# Altium PCB Umgebungssensor_PCB.PcbDoc
Units mm, origin at the board's own origin, x right, y up, seen from the top; angles counter-clockwise.
Board outline 45.1 x 29 mm, 2 copper layers (Top Layer, Bottom Layer); 3 components, 4 nets, 27 pads, 0 vias.
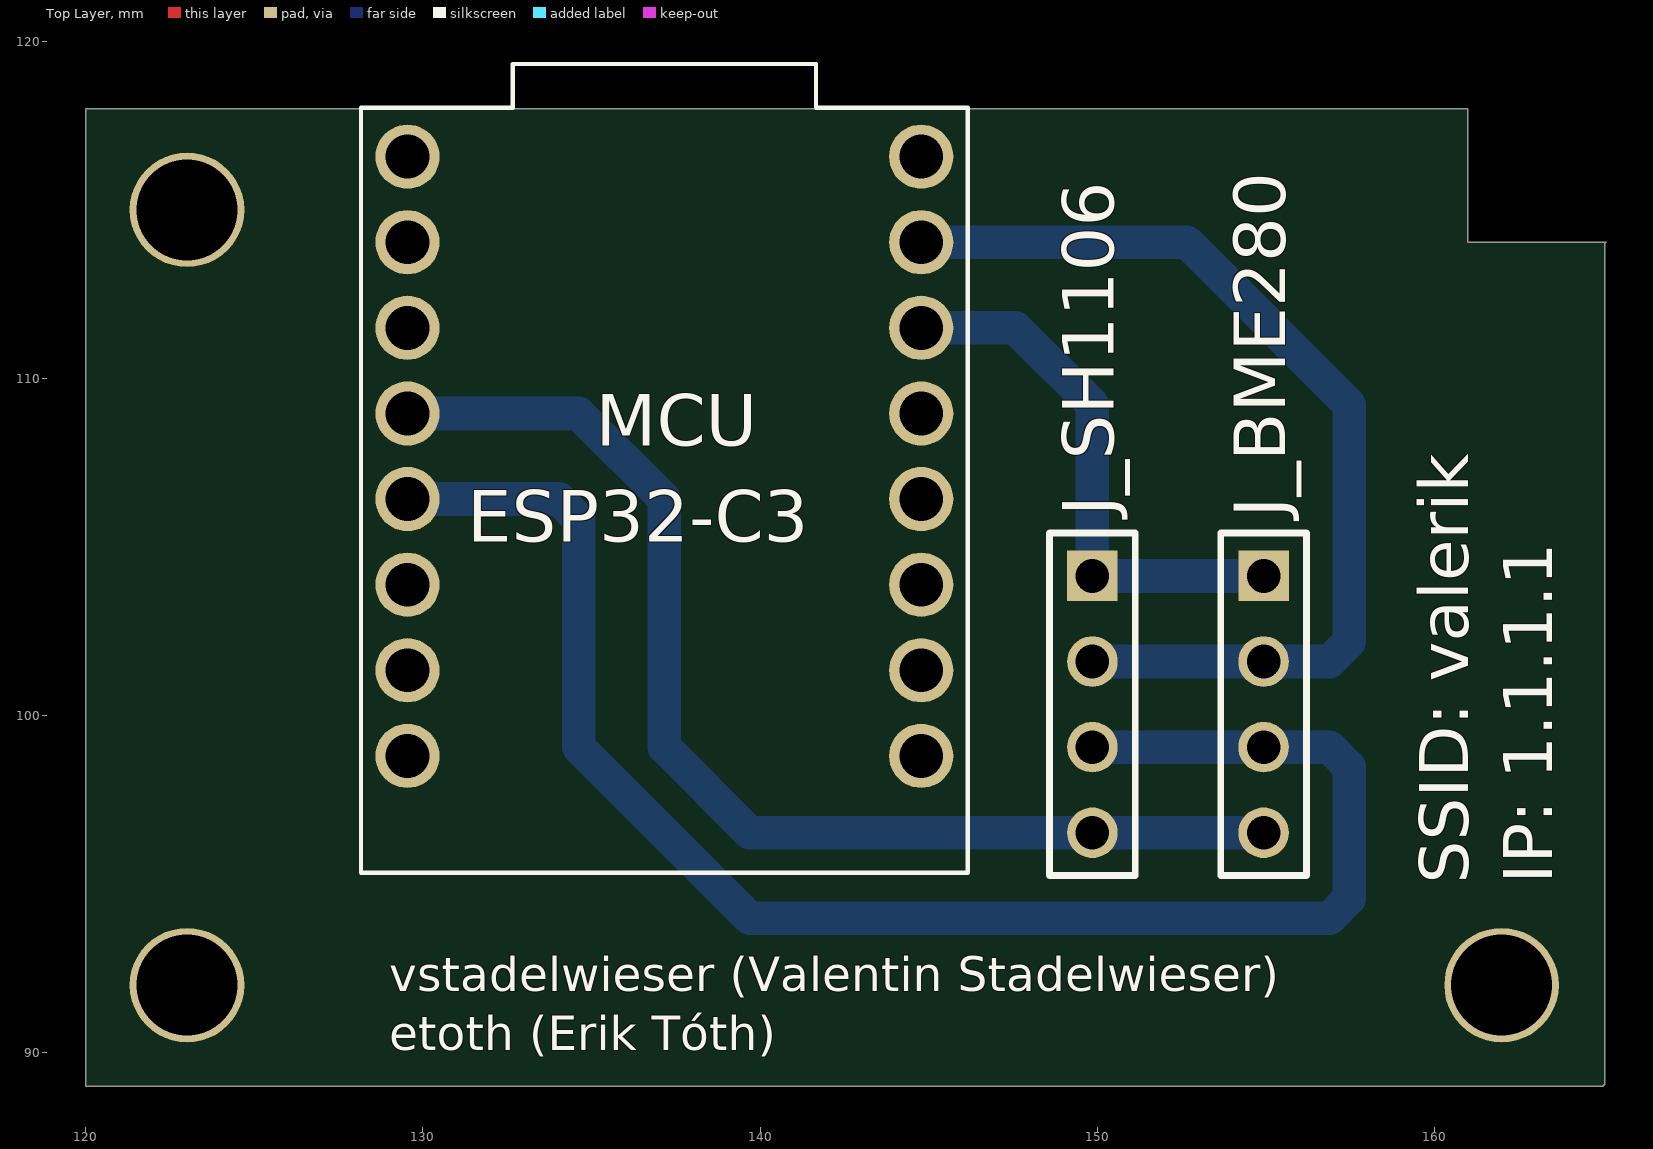
[diagram p0: Top Layer view]
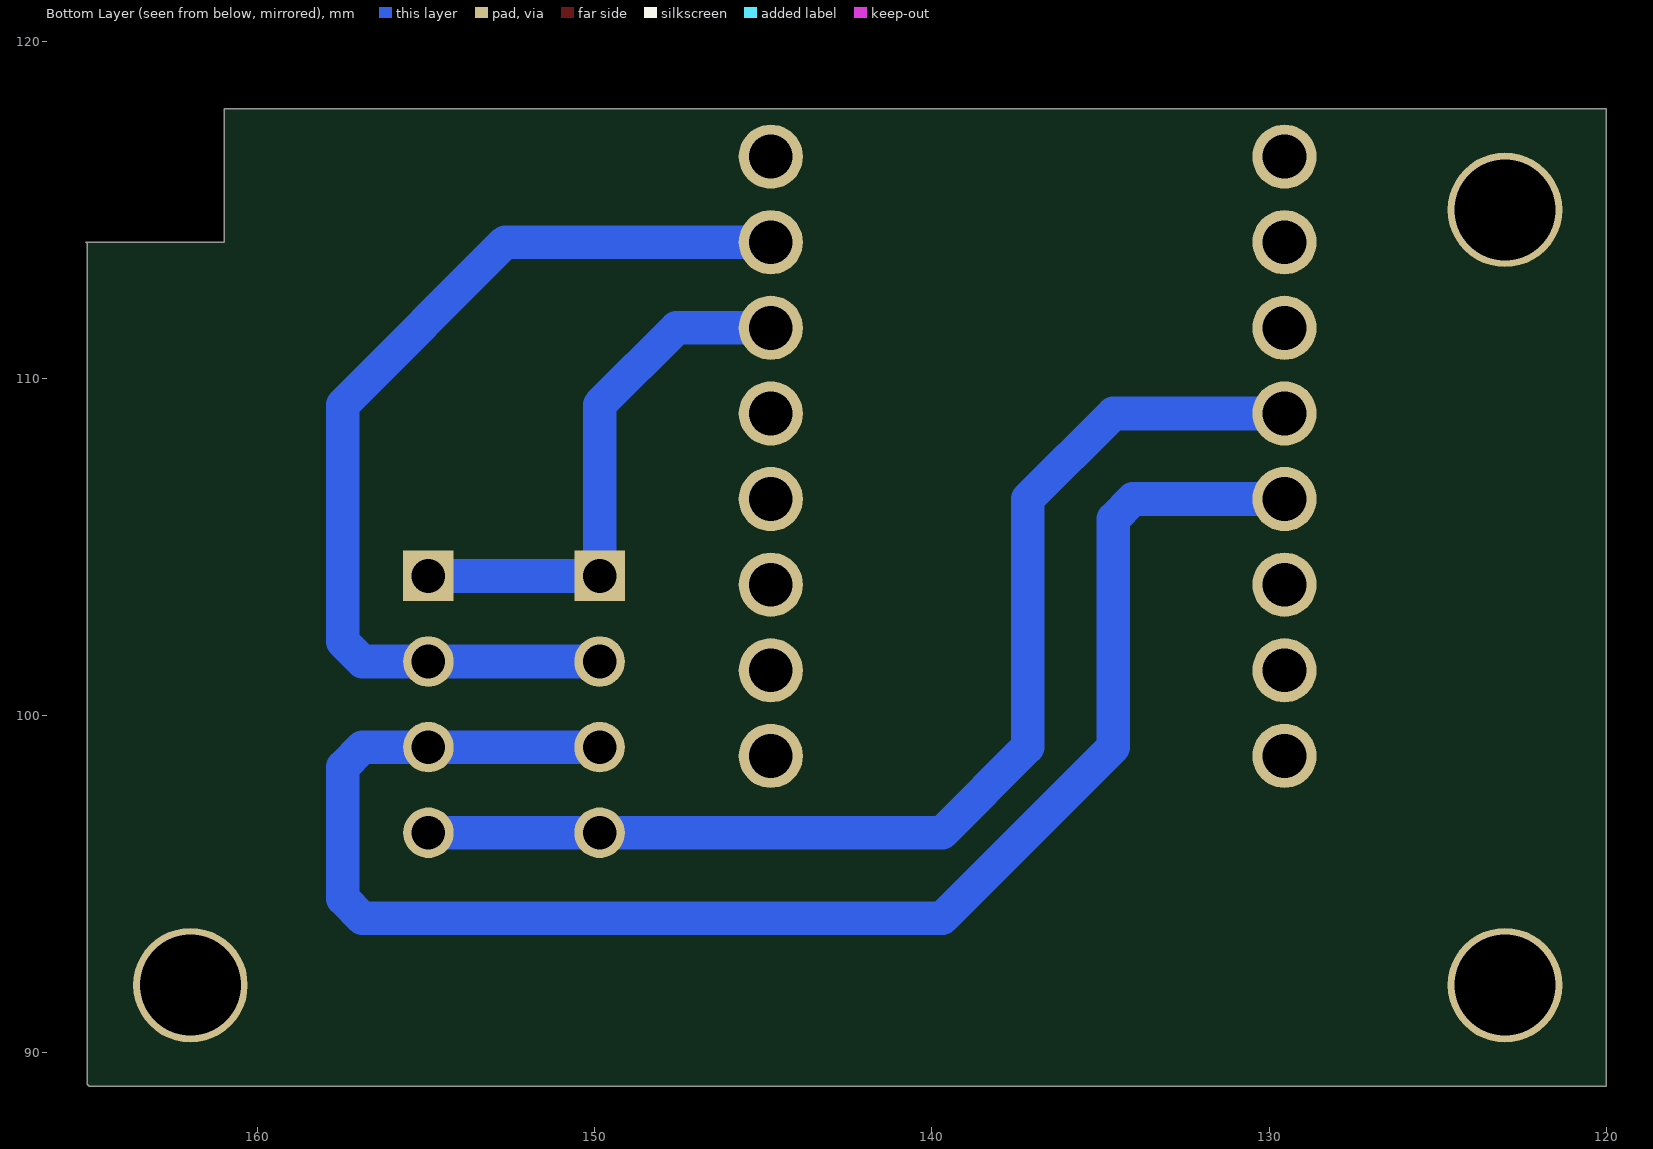
[diagram p1: Bottom Layer view, seen from below]

## Layer stack, top to bottom
Top Solder: solder mask 0.0102, Solder Resist, Dk 3.5
Top Layer: signal copper 0.0356
Dielectric1: dielectric 0.32, FR-4, Dk 4.8
Bottom Layer: signal copper 0.0356
Bottom Solder: solder mask 0.0102, Solder Resist, Dk 3.5

## Board outline
120,89 120,118 161,118 161,114.04 165.1,114.04 165.06,114 165.06,89.06 165,89

## Design rules (kind name [scope] priority, off if disabled: settings)
Clearance "Text (Polygon)" [inPolygon vs isText] p1: gap=0 ignorepadtopadclearanceinfootprint=FALSE
Clearance "Masseflaeche (Polygon)" [All vs inPolygon] p2: gap=0.508 ignorepadtopadclearanceinfootprint=FALSE except(0: Arc-Hole Track-Hole SMDPad-Hole THPad-Hole Via-Hole Fill-Hole Poly-Hole Region-Hole Text-Hole)
Clearance "Abstand (Clearance)" [All] p3: gap=0.254 ignorepadtopadclearanceinfootprint=FALSE except(0: Arc-Hole Track-Hole SMDPad-Hole THPad-Hole Via-Hole Fill-Hole Poly-Hole Region-Hole Text-Hole)
DiffPairsRouting [All] p1: maxlimit=0.381 minlimit=0.305 mostfreqgap=0.305 toplayer_minwidth=0.381 toplayer_maxwidth=0.381 toplayer_prefwidth=0.381 bottomlayer_minwidth=0.381 bottomlayer_maxwidth=0.381 bottomlayer_prefwidth=0.381 maxuncoupledlength=12.7
FabricationTestPointUsage TestPointUsage [All] p1: valid=0 allowmultiple=FALSE
FabricationTestpoint Testpoint [All] p1: side=3 testpointundercomponent=TRUE minsize=1.016 maxsize=2.54 preferedsize=1.524 minholesize=0 maxholesize=1.016 preferedholesize=0.813 testpointgrid=0.025 allowsidetop=TRUE allowsidebottom=TRUE usegrid=TRUE gridtolerance=0
HoleSize [All] p1: absolutevalues=TRUE maxlimit=2.54 minlimit=0.711 maxpercent=80.000 minpercent=20.000
HoleToHoleClearance [All] p1: gap=0.254 allowstackedmicrovias=FALSE
PlaneConnect [All] p1: planeconnectstyle=Relief reliefexpansion=0.508 reliefentries=4 reliefconductorwidth=0.813 reliefairgap=0.254
PolygonConnect [All] p1: connectstyle=Relief reliefconductorwidth=0.813 reliefentries=4 polygonreliefangle="90 Angle" airgapwidth=0.254
RoomDefinition Umgebungssensor_PCB [InComponentClass('Umgebungssensor_PCB')] p1: confinementstyle=ConfineIn formatcopy=TRUE lockcomponents=FALSE outline 63.5,53.34 218.44,53.34 218.44,157.48 63.5,157.48
RoutingVias [All] p1: holewidth=0.711 width=1.27 viastyle="Through Hole" minholewidth=0.711 minwidth=1.27 maxholewidth=0.711 maxwidth=1.27
SMDEntry [All] p1: side=TRUE corner=TRUE anyangle=FALSE
SilkToSilkClearance [All] p1 off: silktosilkclearance=0.254
SilkToSolderMaskClearance SilkscreenOverComponentPads [IsPad] p1 off: minsilkscreentomaskgap=0.254 clearancetoexposedcopper=TRUE
SolderMaskExpansion [All] p1: expansion=0.102 istentingtop=FALSE
UnRoutedNet [All] p1: checkbadconnections=TRUE
Width [All] p1: maxlimit=5.08 minlimit=0.279 preferedwidth=0.635 minimp=50.000000 maximp=50.000000 favimp=50.000000
21 further rules are at their usual default settings.

## Components (designator, comment, footprint, x,y, rotation, side; value= is the part's Value field where it differs from the comment)
J_BME280 "Header 4" HDR1X4 154.94,104.14 r270 top
J_SH1106 "Header 4" HDR1X4 149.86,104.14 r270 top
MCU "ESP32-C3" MODULE_ESP32-C3_SUPERMINI 137.16,106.68 r0 top

## Footprints (in the part's own frame and the unit in brackets; to place one, negate y for a bottom-side part, rotate by r counter-clockwise, add the part's x,y. Pads: shape width x height; smd on the part's side, far side on the other; paste and mask are expansions set on the pad)
HDR1X4 [mm] "Connector; Header; 4 Position"
  rect 1.5x1.5 hole 1: 1(0,0)
  round 1.5 hole 1: 2(2.54,0) 3(5.08,0) 4(7.62,0)
  silkscreen extent -1.27,-1.27 8.89,1.27
MODULE_ESP32-C3_SUPERMINI [mm]
  round 1.905 hole 1.3: 0(7.62,-7.88) 1(7.62,-5.34) 2(7.62,-2.8) 3(7.62,-0.26) 3.3(7.62,4.82) 4(7.62,2.28) 5(-7.62,9.9) 5V(7.62,9.9) 6(-7.62,7.36) 7(-7.62,4.82) 8(-7.62,2.28) 9(-7.62,-0.26) 10(-7.62,-2.8) 20(-7.62,-5.34) 21(-7.62,-7.88) G(7.62,7.36)
  silkscreen extent -9,-11.35 9,12.65, body extent -9,-11.35 9,12.65, height 4.16

## Part data
J_BME280 J_SH1106: "Header, 4-Pin", LatestRevisionDate=17-Jul-2002, LatestRevisionNote="Re-released for DXP Platform.", Publisher="Altium Limited"
MCU: library part ESP32-C3_SUPERMINI_TH, "Super tiny ESP32-C3 board", Package=Package, Check_prices=https://www.snapeda.com/parts/ESP32-C3%20SuperMini_TH/Espressif+Systems/view-part/?ref=eda, MF="Espressif Systems", MP="ESP32-C3 SuperMini_TH", SnapEDA_Link=https://www.snapeda.com/parts/ESP32-C3%20SuperMini_TH/Espressif+Systems/view-part/?ref=snap

## Free pads (board coordinates)
  round 3.4 hole 3: 55(123,115) 56(123,92) 57(162,92)

## Nets (pads, with @x,y where several pads share a name; then routed paths per layer and width w, separated by ;. In a path a pad name is that pad's centre, name@x,y a point inside that pad or via, vN(x,y) a via of type N, cw(c..) or ccw(c..) an arc to the next point about the centre after c; other vN are vias at no path point)
3V3: J_BME280.1 J_SH1106.1 MCU.3.3 | length 16.2
  Bottom Layer w1: MCU.3.3 147.58,111.5 149.86,109.22 J_SH1106.1 J_BME280.1
GND: J_BME280.2 J_SH1106.2 MCU.G | length 29.6
  Bottom Layer w1: MCU.G 152.66,114.04 157.48,109.22 157.48,102.186 156.894,101.6 J_BME280.2 J_SH1106.2
SCK: J_BME280.3 J_SH1106.3 MCU.9 | length 49.1
  Bottom Layer w1: MCU.9 134.034,106.42 134.62,105.834 134.62,99.06 139.7,93.98 156.894,93.98 157.48,94.566 157.48,98.474 156.894,99.06 J_BME280.3 J_SH1106.3
SDA: J_BME280.4 J_SH1106.4 MCU.8 | length 34.9
  Bottom Layer w1: MCU.8 134.62,108.96 137.16,106.42 137.16,99.06 139.7,96.52 J_SH1106.4 J_BME280.4
pads on no net: MCU.0 MCU.1 MCU.2 MCU.3 MCU.4 MCU.5 MCU.5V MCU.6 MCU.7 MCU.10 MCU.20 MCU.21

## Other copper
Top Layer:
  text "LAYOUT TOP" at 261.62,22.352 h1.78
  text "2" at 261.62,7.112 h1.78
Bottom Layer:
  text "LAYOUT BOTTOM" at 261.62,22.352 h1.78
  text "3" at 261.62,7.112 h1.78

## Silkscreen, mask and mechanical layers (free items; w line width, h text height)
Top Overlay:
  text "SSID: valerik / IP: 1.1.1.1" at 164,95 h2.5 r90
  text "vstadelwieser (Valentin Stadelwieser) / etoth (Erik Tóth)" at 129,89.72 h1.75
  text "BESTUECK. TOP" at 261.62,22.352 h1.78
  text "4" at 261.62,7.112 h1.78
Bottom Overlay:
  text "BESTUECK. BOTTOM" at 261.62,22.352 h1.78
  text "5" at 261.62,7.112 h1.78
Mechanical 4 (Printumriss):
  lines w0.203: 120,89 165,89 165.06,89.06 165.06,114 165.02,114.04 161,114.04 161,118 120,118 120,89
Mechanical 16 (Blatt-Beschriftung):
  drawing of 350 lines, arcs and shapes, not listed
  text "1" at 36.246,189.611 h1.78
  text "2" at 108.89,189.611 h1.78
  text "3" at 182.042,189.611 h1.78
  text "4" at 254.94,189.611 h1.78
  text "A" at 1.905,166.599 h1.78
  text "A" at 288.925,166.599 h1.78
  text "B" at 1.905,118.542 h1.78
  text "B" at 288.925,118.542 h1.78
  text "C" at 1.905,70.028 h1.78
  text "C" at 288.925,70.028 h1.78
  text "TITEL:" at 173.99,33.02 h1.14
  text "PROJEKTNAME" at 175.26,29.972 h1.78
  text "NAME:" at 173.99,25.4 h1.14
  text "GRUPPE:" at 212.09,25.4 h1.14
  text "KLASSE:" at 233.172,25.4 h1.14
  text "DOKUMENTENART:" at 260.35,25.4 h1.14
  text "MAX MUSTERMANN" at 175.26,22.352 h1.78
  text "I" at 213.36,22.352 h1.78
  text "KLASSE" at 234.442,22.352 h1.78
  text "D" at 1.905,22.022 h1.78
  text "D" at 288.925,22.022 h1.78
  text "DATUM:" at 173.99,17.78 h1.14
  text "REVISION:" at 212.09,17.78 h1.14
  text "MASZSTAB:" at 233.172,17.78 h1.14
  text "DOKUMENTENSTATUS:" at 260.35,17.78 h1.14
  text "HTBLVA" at 140.97,15.24 h1.78
  text ".PRINT_DATE" at 175.26,14.732 h1.78
  text "0.1" at 213.36,14.732 h1.78
  text ".Print_Scale" at 234.442,14.732 h1.78
  text "ENTWURF" at 261.62,14.732 h1.78
  text "Abt. Elektronik" at 140.97,12.7 h1.78
  text "Anichstrasse 26-28" at 140.97,10.16 h1.78
  text "SACHNUMMER/DATEINAME:" at 173.99,10.16 h1.14
  text "BLATT:" at 260.35,10.16 h1.14
  text "BLAETTER:" at 274.32,10.16 h1.14
  text "A-6020 Innsbruck" at 140.97,7.62 h1.78
  text ".PCB_FILE_NAME_NO_PATH" at 175.26,7.112 h1.78
  text "6" at 275.59,7.112 h1.78
  text "1" at 36.246,1.651 h1.78
  text "2" at 108.89,1.651 h1.78
  text "3" at 182.042,1.651 h1.78
  text "4" at 254.94,1.651 h1.78
Drill Drawing:
  text ".LEGEND" at 119.38,45.72 h1.52
  text "BOHRPLAN" at 261.62,22.352 h1.78
  text "6" at 261.62,7.112 h1.78